# EAGLE board flossjtag-teardrops (EAGLE 7.4.0)
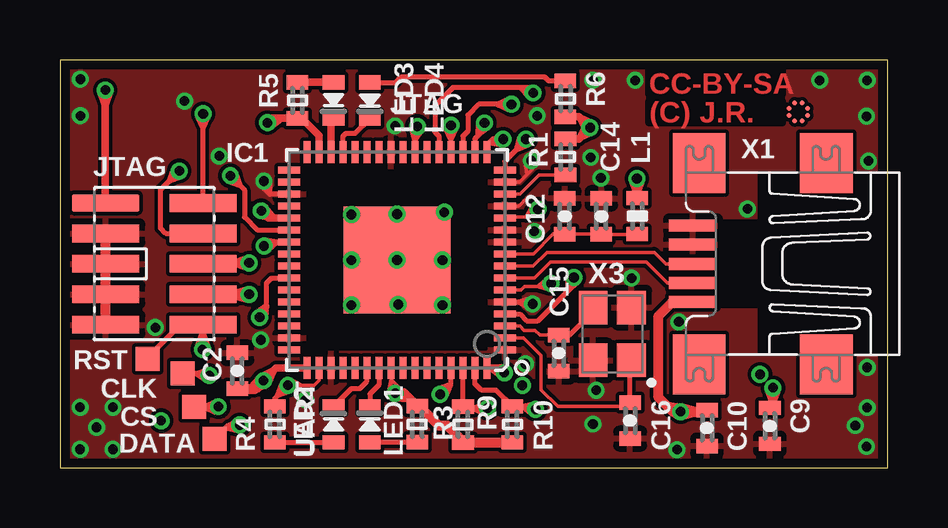
[diagram p0: board, top side]
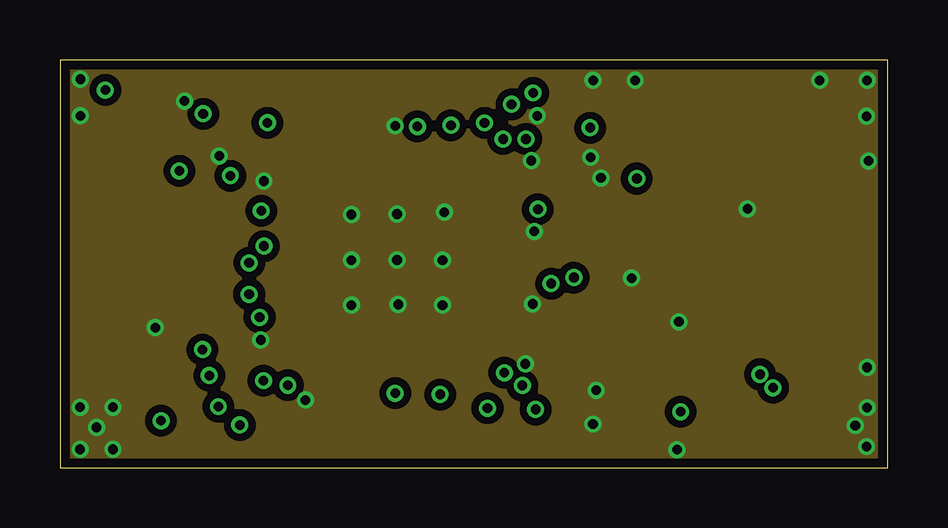
[diagram p1: board, inner layer Route2]
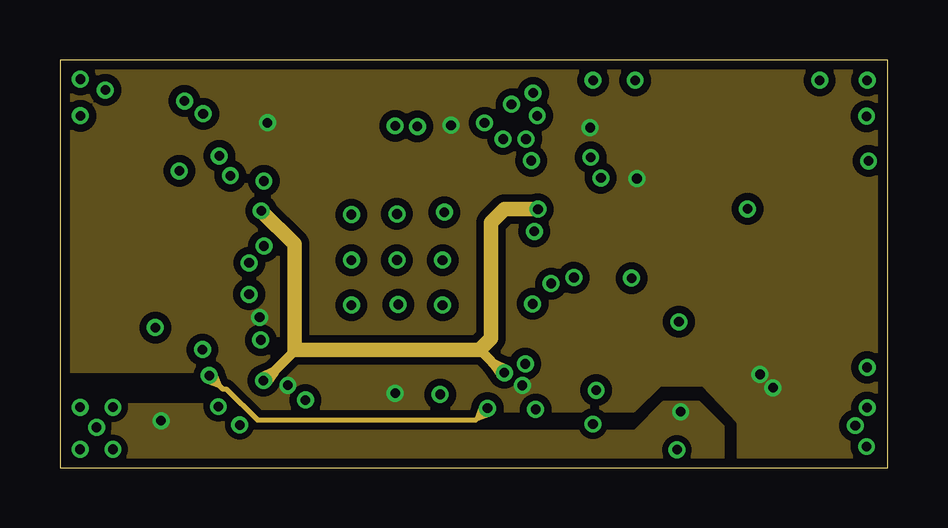
[diagram p2: board, inner layer Route15]
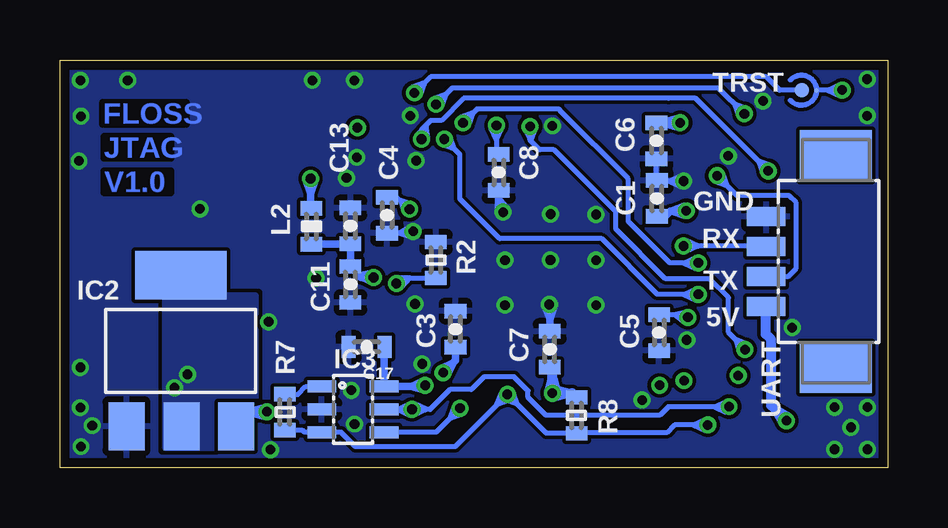
[diagram p3: board, bottom side, seen from below]

Size 34.5 x 17 mm. Coordinates in mm from the lower left corner, seen from the top.
Outline: 0,0 34.5,0 34.5,17 0,17 0,0
Copper layers (1*2+15*16): Top 0.035mm / dielectric 0.3mm / Route2 0.035mm / dielectric 0.15mm / Route15 0.035mm / dielectric 0.3mm / Bottom 0.035mm
Design rules "default *": minimum track width 6mil, minimum drill 13mil, track to track 6mil, track to pad 7mil, pad to pad 7mil, via to via 7mil, smd to smd 6mil, copper to edge 15mil, drill to drill 8mil, minimum pad ring 0.1mm, minimum via ring 6mil, stop-mask expansion 4mil, vias tented up to drill 0.4mm, thermal gap 10mil

## Footprints (pad centres in the part's own frame; a part is rotated, then mirrored left to right if it is on the bottom)
0603-CAP = smd 0.6 x 0.9: P$1 -0.75,0; P$2 0.75,0
CIRC_JMP = smd 0.61 x 0.61: 1 0,0 | smd 0.203 x 0.203: 2 0,0.617
SMD1,27 = smd 1 x 1: 1 0,0
QFN64 = smd 0.9 x 0.3: P$1 -4.5,3.75; P$2 -4.5,3.25; P$3 -4.5,2.75; P$4 -4.5,2.25; P$5 -4.5,1.75; P$6 -4.5,1.25; P$7 -4.5,0.75; P$8 -4.5,0.25; P$9 -4.5,-0.25; P$10 -4.5,-0.75; P$11 -4.5,-1.25; P$12 -4.5,-1.75; P$13 -4.5,-2.25; P$14 -4.5,-2.75; P$15 -4.5,-3.25; P$16 -4.5,-3.75; P$33 4.5,-3.75; P$34 4.5,-3.25; P$35 4.5,-2.75; P$36 4.5,-2.25; P$37 4.5,-1.75; P$38 4.5,-1.25; P$39 4.5,-0.75; P$40 4.5,-0.25; P$41 4.5,0.25; P$42 4.5,0.75; P$43 4.5,1.25; P$44 4.5,1.75; P$45 4.5,2.25; P$46 4.5,2.75; P$47 4.5,3.25; P$48 4.5,3.75 | smd 0.3 x 0.9: P$17 -3.75,-4.5; P$18 -3.25,-4.5; P$19 -2.75,-4.5; P$20 -2.25,-4.5; P$21 -1.75,-4.5; P$22 -1.25,-4.5; P$23 -0.75,-4.5; P$24 -0.25,-4.5; P$25 0.25,-4.5; P$26 0.75,-4.5; P$27 1.25,-4.5; P$28 1.75,-4.5; P$29 2.25,-4.5; P$30 2.75,-4.5; P$31 3.25,-4.5; P$32 3.75,-4.5; P$49 3.75,4.5; P$50 3.25,4.5; P$51 2.75,4.5; P$52 2.25,4.5; P$53 1.75,4.5; P$54 1.25,4.5; P$55 0.75,4.5; P$56 0.25,4.5; P$57 -0.25,4.5; P$58 -0.75,4.5; P$59 -1.25,4.5; P$60 -1.75,4.5; P$61 -2.25,4.5; P$62 -2.75,4.5; P$63 -3.25,4.5; P$64 -3.75,4.5 | smd 4.45 x 4.45: P$65 0,0
SOT223 = smd 1.499 x 2.007: 1 -2.261,-3.15; 2 0.025,-3.15; 3 2.311,-3.15 | smd 3.81 x 2.007: 4 0,3.15
SO23-6 = smd 0.5 x 1.2: 1 -0.95,-1.3; 2 0,-1.3; 3 0.95,-1.3; 4 0.95,1.3; 5 0,1.3; 6 -0.95,1.3
JOBY_LOGO_6MIL = smd 0.203 x 0.203: 1 -0.152,0.381; 2 0.152,0.381; 3 0.381,0.152; 4 0.381,-0.152; 5 0.152,-0.381; 6 -0.152,-0.381; 7 -0.381,-0.152; 8 -0.381,0.152
FTSH-105-DV = smd 0.74 x 2.8: 1 -2.54,-2.03; 2 -2.54,2.03; 3 -1.27,-2.03; 4 -1.27,2.03; 5 0,-2.03; 6 0,2.03; 7 1.27,-2.03; 8 1.27,2.03; 9 2.54,-2.03; 10 2.54,2.03
0603-IND = smd 0.6 x 0.9: P$1 -0.75,0; P$2 0.75,0
0603-LED = smd 0.6 x 0.9: A 0.75,0; C -0.75,0
0603-RES = smd 0.6 x 0.9: P$1 -0.75,0; P$2 0.75,0
PB-53261-04 = smd 0.8 x 1.6: 1 1.875,1.1; 2 0.625,1.1; 3 -0.625,1.1; 4 -1.875,1.1 | smd 2.1 x 3: MNT1 -4.425,-1.8; MNT2 4.425,-1.8
UX60A-MB-5ST = smd 2 x 0.5: 1 2.25,1.6; 2 2.25,0.8; 3 2.25,0; 4 2.25,-0.8; 5 2.25,-1.6 | smd 2.2 x 2.5: M1 -3.3,-4.2; M2 -3.3,4.2; M3 2,4.2; M4 2,-4.2
NX3225SA = smd 1.4 x 1.2: 1 -1.1,-0.8; 2 1.1,-0.8; 3 1.1,0.8; 4 -1.1,0.8

## Placement (x,y rotation side)
C1  100n  [0603-CAP]  9.61,11.22 90 bottom
C2  3u3  [0603-CAP]  7.4,4.04 90 top
C3  100n  [0603-CAP]  18.01,5.77 90 bottom
C4  100n  [0603-CAP]  20.86,10.53 270 bottom
C5  100n  [0603-CAP]  9.53,5.63 270 bottom
C6  100n  [0603-CAP]  9.63,13.63 270 bottom
C7  100n  [0603-CAP]  14.08,4.93 90 bottom
C8  100n  [0603-CAP]  16.21,12.31 270 bottom
C9  CAPACITOR  [0603-CAP]  29.59,1.74 270 top
C10  100n  [0603-CAP]  26.98,1.65 270 top
C11  100n  [0603-CAP]  22.39,7.64 270 bottom
C12  100n  [0603-CAP]  21.04,10.48 90 top
C13  4u7  [0603-CAP]  22.39,10.08 90 bottom
C14  4u7  [0603-CAP]  22.57,10.48 90 top
C15  27p  [0603-CAP]  20.79,4.76 270 top
C16  27p  [0603-CAP]  23.77,1.96 270 top
C17  100n  [0603-CAP]  21.72,5.03 180 bottom
CJ1  CIRC_JMP  [CIRC_JMP]  3.58,15.74 270 bottom
CLK  WIREPAD  [SMD1,27]  5.11,3.94 0 top
CS  WIREPAD  [SMD1,27]  5.59,2.54 0 top
DATA  WIREPAD  [SMD1,27]  6.45,1.19 0 top
DRILEGEND  [DRILEGEND]  -2.76,-5.53 0 top  (outside the outline)
IC1  FT2232HLQFN64  [QFN64]  14.05,8.65 180 top
IC2  REG1117  [SOT223]  29.46,4.87 0 bottom
IC3  93C46-SO23-6  [SO23-6]  22.28,2.43 270 bottom
JL1  JOBY_LOGO-6MIL  [JOBY_LOGO_6MIL]  30.78,14.83 0 top
JTAG  CONN_5-2-FTSH-V  [FTSH-105-DV]  3.94,8.5 270 top
L1  [0603-IND]  24.07,10.49 270 top
L2  [0603-IND]  24.02,10.06 270 bottom
LED1  [0603-LED]  12.92,1.8 270 top
LED2  [0603-LED]  11.4,1.8 270 top
LED3  LED  [0603-LED]  11.4,15.32 90 top
LED4  LED  [0603-LED]  12.92,15.31 90 top
R1  1k  [0603-RES]  21.07,12.95 270 top
R2  12k  [0603-RES]  18.83,8.66 270 bottom
R3  220  [0603-RES]  14.89,1.8 90 top
R4  220  [0603-RES]  8.96,1.8 90 top
R5  220  [0603-RES]  9.9,15.31 270 top
R6  220  [0603-RES]  21.07,15.38 270 top
R7  2k2  [0603-RES]  25.12,2.32 90 bottom
R8  10k  [0603-RES]  12.96,2.18 270 bottom
R9  10k  [0603-RES]  16.8,1.79 90 top
R10  10k  [0603-RES]  18.86,1.8 90 top
RST  RST  [SMD1,27]  3.66,4.52 0 top
UART  [PB-53261-04]  3.96,8.6 90 bottom
X1  MINI-USB-UX60A-MB-5ST  [UX60A-MB-5ST]  28.64,8.5 180 top
X3  12MHz  [NX3225SA]  23.03,5.57 90 top

## Library data of the parts
C1-C8 C11-C14 L1 L2 R1-R10 = res_cap
C9 C10 C15-C17 LED1-LED4 UART = open-bldc
CJ1 = fancy_jumpers
CLK CS DATA RST = wirepad
DRILEGEND = drilegend
IC1 = ftdi-jtag
IC2 = burr-brown
IC3 X3 = misc
JL1 = aspirin
JTAG = pel_misc
X1 = con-hirose

## Nets
+3V3: C5.P$1 C6.P$1 C7.P$1 C8.P$1 C9.P$1 C17.P$1 IC1.P$20 IC1.P$31 IC1.P$42 IC1.P$50 IC1.P$56 IC2.2 IC2.4 IC3.6 L1.P$1 L2.P$1 R1.P$1 R3.P$2 R4.P$2 R5.P$2 R6.P$2 R8.P$1 R9.P$1 R10.P$1
+5V: C10.P$1 IC2.3 UART.4 X1.1
EECLK: CLK.1 IC1.P$62 IC3.4 R9.P$2
EECS: CS.1 IC1.P$63 IC3.5 R10.P$2
EEDATA: DATA.1 IC1.P$61 IC3.3 R7.P$1 R8.P$2
GND: C1.P$2 C2.P$2 C3.P$2 C4.P$2 C5.P$2 C6.P$2 C7.P$2 C8.P$2 C9.P$2 C10.P$2 C11.P$2 C12.P$2 C13.P$2 C14.P$2 C15.P$2 C16.P$2 C17.P$2 IC1.P$1 IC1.P$5 IC1.P$10 IC1.P$11 IC1.P$13 IC1.P$15 IC1.P$25 IC1.P$35 IC1.P$47 IC1.P$51 IC1.P$65 IC2.1 IC3.2 JTAG.3 JTAG.5 JTAG.7 JTAG.9 R2.P$1 UART.1 X1.4 X1.5 X3.2 X3.4
JRXD_LED: IC1.P$29 LED4.C
JTXD_LED: IC1.P$30 LED3.C
N$1: IC1.P$14 R1.P$2
N$2: IC1.P$6 R2.P$2
N$3: IC1.P$7 X1.2
N$4: IC1.P$8 X1.3
N$6: C16.P$1 IC1.P$2 X3.1
N$7: C12.P$1 C14.P$1 IC1.P$9 L1.P$2
N$8: C11.P$1 C13.P$1 IC1.P$4 L2.P$2
N$9: C15.P$1 IC1.P$3 X3.3
N$10: LED1.A R3.P$1
N$11: LED2.A R4.P$1
N$12: LED3.A R5.P$1
N$13: LED4.A R6.P$1
N$17: IC3.1 R7.P$2
N$19: CJ1.2 JTAG.1
RST: IC1.P$23 JTAG.10 RST.1
RXD: IC1.P$39 UART.2
RXD_LED: IC1.P$54 LED2.C
TCK: IC1.P$16 JTAG.4
TDI: IC1.P$17 JTAG.8
TDO: IC1.P$18 JTAG.6
TMS: IC1.P$19 JTAG.2
TRST: CJ1.1 IC1.P$21
TXD: IC1.P$38 UART.3
TXD_LED: IC1.P$55 LED1.C
VCC: C1.P$1 C2.P$1 C3.P$1 C4.P$1 IC1.P$12 IC1.P$37 IC1.P$49 IC1.P$64

## Tracks (layer width: path | path; a pad name or v marks a point on that pad's centre or on a via)
+3V3  (via drill 0.4 pad 0.64)
  Top 0.152: R4.P$2 8.9,2.55 | R3.P$2 14.75,2.55 | R3.P$2 15.05,2.55 | R9.P$1 16.86,1.04 | 15,2.55 R3.P$2 | R5.P$2 9.88,14.55 | v9.5,3.43 10.59,3.43 10.79,3.63 IC1.P$50 | IC1.P$56 13.8,3.27 v13.97,3.1 | v9.5,3.43 9.63,3.68 10.1,3.43 9.63,3.19 v9.5,3.43 | v13.97,3.1 13.7,3.15 13.8,3.68 14.17,3.29 v13.97,3.1
  Top 0.203: IC1.P$42 8.82,7.91 8.61,7.7 8.61,6.55 v8.32,6.26 | IC1.P$20 v16.3,14.28 | R4.P$2 8.96,2.9 v9.5,3.43 | v9.5,3.43 9.59,3.2 9.07,3.01 9.26,3.52 v9.5,3.43 | v8.32,6.26 8.17,6.46 8.61,6.79 8.57,6.25 v8.32,6.26 | v16.3,14.28 16.53,14.17 16.3,13.68 16.07,14.17 v16.3,14.28
  Top 0.305: IC1.P$31 10.8,13.85 10.1,14.55 9.88,14.55 9.63,14.55 | v22.1,14.18 21.64,14.63 R6.P$2 | v22.1,14.18 21.63,13.7 R1.P$1 | L1.P$1 24.05,11.26 v24.05,12.05 | v8.65,14.38 8.83,14.56 R5.P$2 | C9.P$1 29.73,2.62 v29.73,3.33 | v8.65,14.38 8.65,14.58 9.22,14.56 8.77,14.22 v8.65,14.38 | v22.1,14.18 21.92,14.09 21.68,14.6 22.19,14.36 v22.1,14.18 | v22.1,14.18 22.19,13.99 21.68,13.75 21.92,14.26 v22.1,14.18 | v24.05,12.05 24.24,11.99 24.05,11.45 23.86,11.99 v24.05,12.05 | v29.73,3.33 29.91,3.26 29.73,2.73 29.54,3.26 v29.73,3.33
  Top 0.406: 15,2.55 15.8,1.75 16.15,1.75 16.8,1.1 R9.P$1 | v13.97,3.1 14.34,3.1 R3.P$2 | 16.86,1.04 16.86,1.05 R10.P$1 | v13.97,3.1 14.06,3.23 14.54,2.9 13.96,2.95 v13.97,3.1
  Bottom 0.203: C5.P$1 8.44,6.38 v8.32,6.26 | C8.P$1 IC1.P$20 16.3,13.72 v16.3,14.28 | v8.32,6.26 8.38,6.51 8.91,6.38 8.47,6.06 v8.32,6.26 | v16.3,14.28 16.53,14.17 16.3,13.68 16.07,14.17 v16.3,14.28
  Bottom 0.305: v19.27,3.42 19.32,3.38 IC3.6 20.98,5.01 C17.P$1 | L2.P$1 24.05,10.84 v24.05,12.05 | v24.05,12.05 24.24,11.99 24.05,11.45 23.86,11.99 v24.05,12.05 | v19.27,3.42 19.36,3.61 19.87,3.38 19.33,3.23 v19.27,3.42
  Bottom 0.406: C6.P$1 v8.65,14.38 | C7.P$1 13.97,4.08 v13.97,3.1 | R8.P$1 13.14,3.1 v13.97,3.1 | v13.97,3.1 13.83,3.14 13.97,3.7 14.12,3.14 v13.97,3.1 | v13.97,3.1 13.94,2.96 13.37,3.1 13.94,3.25 v13.97,3.1 | v8.65,14.38 8.69,14.53 9.25,14.38 8.68,14.24 v8.65,14.38
  Bottom 0.813: IC2.4 29.21,7.77
  other vias: 29.18,3.89
  pour Route15 (isolate 0.305): 0,4.05 6.67,4.04 8.1,2.4 23.9,2.4 25,3.5 26.8,3.5 28.3,1.9 28.3,0 34.5,0 34.5,17 0,17
  pour Bottom (no thermals): 26.37,0.84 26.37,7.16 30.1,7.16 30.1,0.84
+5V  (via drill 0.4 pad 0.64)
  Top 0.406: X1.1 25.52,6.9 24.95,6.33 24.95,2.93 25.55,2.33 v25.88,2.33 | C10.P$1 26.9,2.33 v25.88,2.33 | v25.88,2.33 25.79,2.21 25.32,2.56 25.9,2.47 v25.88,2.33 | v25.88,2.33 25.91,2.47 26.48,2.33 25.91,2.18 v25.88,2.33
  Bottom 0.203: IC2.3 27.15,1.88 26.7,2.33
  Bottom 0.406: 26.7,2.33 v25.88,2.33 | UART.4 5.08,6.72 5.08,5.56 4.85,5.33 4.85,2.59 v4.22,1.96 | v25.88,2.33 25.91,2.47 26.48,2.33 25.91,2.18 v25.88,2.33 | v4.22,1.96 4.14,2.08 4.64,2.38 4.34,1.88 v4.22,1.96
  pour Route15 (isolate 0.254): 0,0 0,2.6 6.6,2.6 7.5,1.5 24,1.5 25.2,2.7 26.6,2.7 27.6,1.7 27.6,0
EECLK  (via drill 0.4 pad 0.64)
  Top 0.203: CLK.1 6.12,3.94 v6.22,3.83 | IC1.P$62 | IC1.P$62 R9.P$2 16.87,2.47 v17.82,2.47 | v17.82,2.47 17.72,2.25 17.22,2.47 17.72,2.7 v17.82,2.47 | v6.22,3.83 6.08,3.63 5.63,3.94 6.16,4.08 v6.22,3.83
  Route15 0.203: v6.22,3.83 6.78,3.28 6.93,3.28 8.23,1.98 17.3,1.98 17.33,1.98 v17.82,2.47 | v17.82,2.47 17.91,2.24 17.4,2.05 17.59,2.56 v17.82,2.47 | v6.22,3.83 6.46,3.92 6.65,3.41 6.14,3.6 v6.22,3.83
  Bottom 0.203: v17.82,2.47 18.82,1.48 IC3.4 | v17.82,2.47 18.06,2.56 18.25,2.05 17.74,2.24 v17.82,2.47
EECS  (via drill 0.4 pad 0.64)
  Top 0.203: IC1.P$63 17.3,3.5 17.58,3.22 18.19,3.22 R10.P$2 19.7,2.55 v19.82,2.42 | CS.1 v6.6,2.54 | v19.82,2.42 19.67,2.22 19.24,2.55 19.77,2.67 v19.82,2.42 | v6.6,2.54 6.5,2.31 6,2.54 6.5,2.77 v6.6,2.54
  Bottom 0.203: v6.6,2.54 9.14,2.54 9.5,2.18 14.25,2.18 14.99,2.92 14.99,3.2 15.57,3.79 16.82,3.79 17.35,3.25 18.24,3.25 19.06,2.42 v19.82,2.42 | v19.82,2.42 IC3.5 | v19.82,2.42 19.72,2.2 19.23,2.42 19.72,2.65 v19.82,2.42 | v19.82,2.42 19.93,2.65 20.43,2.42 19.93,2.2 v19.82,2.42 | v6.6,2.54 6.71,2.77 7.2,2.54 6.71,2.31 v6.6,2.54
EEDATA  (via drill 0.4 pad 0.64)
  Top 0.203: IC1.P$61 16.3,3.5 v15.85,3.05 | DATA.1 7.04,1.78 v7.49,1.78 | v15.85,3.05 15.76,3.29 16.27,3.47 16.08,2.96 v15.85,3.05 | v7.49,1.78 7.44,1.53 6.91,1.65 7.34,1.98 v7.49,1.78
  Bottom 0.152: 25.11,1.55 R7.P$1
  Bottom 0.203: v15.85,3.05 14.25,1.45 14.23,1.43 R8.P$2 12.94,1.45 9.21,1.45 8.88,1.78 v7.49,1.78 | 25.11,1.55 24.38,1.55 24.3,1.48 IC3.3 22.78,1.48 22.18,0.88 18.02,0.88 v15.85,3.05 | v15.85,3.05 15.93,2.81 15.42,2.63 15.61,3.14 v15.85,3.05 | v15.85,3.05 16.08,3.14 16.27,2.63 15.76,2.81 v15.85,3.05 | v7.49,1.78 7.6,2.01 8.09,1.78 7.6,1.55 v7.49,1.78
GND  (via drill 0.4 pad 0.64)
  Top 0.152: IC1.P$47 | IC1.P$15 19.16,11.9 19.65,12.4 v19.65,12.8 | IC1.P$13 19.14,10.9 19.43,11.2 | v19.65,12.8 19.85,12.61 19.48,12.22 19.38,12.75 v19.65,12.8
  Top 0.203: IC1.P$35 8.74,11.4 8.5,11.65 v8.5,11.95 | IC1.P$5 19.62,6.91 v19.7,6.83 | v8.5,11.95 8.75,11.95 8.75,11.4 8.34,11.76 v8.5,11.95 | v19.7,6.83 19.57,6.61 19.11,6.91 19.63,7.07 v19.7,6.83
  Top 0.305: IC1.P$1 18.74,4.91
  Top 0.406: JTAG.3 JTAG.5 JTAG.7 JTAG.9
  Bottom 0.152: 14.08,6.78 v14.1,6.8 | R2.P$1 19.05,9.41
  Bottom 0.203: v8.5,11.95 9.59,11.95 C1.P$2 9.63,11.99 C6.P$2 | C4.P$2 19.7,9.78 v19.77,9.85 | IC2.1 31.75,1.75 | v8.5,11.95 8.61,12.18 9.1,11.95 8.61,11.72 v8.5,11.95 | v19.77,9.85 19.91,10.06 20.37,9.78 19.85,9.61 v19.77,9.85
  Bottom 0.305: C7.P$2 14.08,6.78 | C8.P$2 16.21,10.84 v16.02,10.65 | v16.02,10.65 15.87,10.77 16.21,11.22 16.23,10.65 v16.02,10.65 | 14.08,6.2 14.29,6.73 v14.1,6.8 13.91,6.74 14.08,6.2
  other vias: 33.62,0.88 33.65,2.5 22.12,12.94 33.65,16.15 31.68,16.15 33.62,14.65 8.37,5.32 10.23,2.82 13.97,14.25 22.55,12.08 33.16,1.75 23.82,7.9 12.15,6.78 15.95,6.78 15.95,8.65 14.05,10.57 14.05,8.65 12.15,8.65 12.15,10.55 19.4,4.32 22.35,3.22 0.84,0.76 2.21,2.51 22.23,16.15 23.98,16.15 33.71,12.79 33.65,4.18 25.8,6.08 25.73,0.75 22.22,1.81 2.21,0.76 0.84,2.51 0.85,14.67 0.85,16.2 28.66,10.79 19.9,14.67 3.97,5.84 6.64,13 5.19,15.28 1.52,1.68
  pour Route2 (isolate 0.305): 0,0 34.5,0 34.5,17 0,17
  pour Top: 0,0 34.5,0 34.5,17 -0.05,17.03
  pour Bottom (rank 6): 0,0 34.5,0 34.5,17 -0.05,17.03
JRXD_LED
  Top 0.203: IC1.P$29 11.8,13.82 11.92,13.94 12.31,13.94 LED4.C
JTXD_LED
  Top 0.305: LED3.C 11.3,14.46 IC1.P$30
N$1
  Top 0.152: IC1.P$14 19.18,11.4 19.98,12.2 R1.P$2
N$2  (via drill 0.4 pad 0.64)
  Top 0.152: v20.47,7.67 20.34,7.54 19.36,7.54 19.22,7.41 IC1.P$6 | v20.47,7.67 20.4,7.41 19.89,7.54 20.3,7.89 v20.47,7.67
  Bottom 0.203: R2.P$2 20.24,7.91 v20.47,7.67 | v20.47,7.67 20.29,7.51 19.92,7.91 20.46,7.93 v20.47,7.67
N$3
  Top 0.152: X1.2 25.32,7.7 24.45,8.57 20.45,8.57 19.79,7.91 IC1.P$7
N$4
  Top 0.152: X1.3 25.25,8.5 24.77,8.97 20.29,8.97 19.72,8.41 IC1.P$8
N$6
  Top 0.152: IC1.P$2 19.32,5.41 20.05,4.67 20.05,3.25 20.75,2.55 23.61,2.55 C16.P$1 | 23.77,4.41 X3.1
  Top 0.203: C16.P$1 23.77,4.41
N$7
  Top 0.152: IC1.P$9 18.56,8.91 19.74,8.91 20.55,9.73 C12.P$1 C14.P$1 24.06,9.73 L1.P$2
N$8  (via drill 0.4 pad 0.64)
  Top 0.203: IC1.P$4 19.17,6.41 19.45,6.12 19.92,6.12 21.43,7.62 v21.43,7.92 | v21.43,7.92 21.59,7.74 21.18,7.38 21.17,7.92 v21.43,7.92
  Bottom 0.305: C13.P$1 C11.P$1 22.39,8.37 21.95,7.92 v21.43,7.92 | C13.P$1 | C13.P$1 24,9.33 L2.P$2 | v21.43,7.92 21.47,8.12 22.02,8 21.51,7.75 v21.43,7.92
N$9
  Top 0.152: IC1.P$3 19.17,5.91 19.35,5.72 19.8,5.72 20,5.53 20.78,5.53 C15.P$1 | 22.23,6.5 X3.3
  Top 0.203: C15.P$1 21.24,5.51 22.23,6.5
N$10
  Top 0.152: R3.P$1
  Top 0.203: R3.P$1 LED1.A
N$11
  Top 0.203: R4.P$1 LED2.A
N$12
  Top 0.305: R5.P$1 LED3.A
N$13
  Top 0.203: LED4.A 13.98,16.06 14.22,16.3 20.2,16.3 20.37,16.13 R6.P$1
N$17
  Bottom 0.152: R7.P$2 25.11,3.05
  Bottom 0.203: IC3.1 24.25,3.38 24.58,3.05 25.11,3.05
N$19  (via drill 0.4 pad 0.64)
  Top 0.305: JTAG.1 1.89,11.05 v1.89,15.74 | v1.89,15.74 2.08,15.68 1.89,15.14 1.7,15.68 v1.89,15.74
  Bottom 0.203: v1.89,15.74 CJ1.2 | v1.89,15.74 1.99,15.97 2.49,15.74 1.99,15.52 v1.89,15.74
RST  (via drill 0.4 pad 0.64)
  Top 0.152: IC1.P$23
  Top 0.203: RST.1 3.66,4.6 5,5.94 5.96,5.94 JTAG.10 | IC1.P$23 14.8,14.13 v14.9,14.23 | v14.9,14.23 15.11,14.09 14.8,13.63 14.66,14.16 v14.9,14.23
  Top 0.305: JTAG.10 5.95,5.93 v5.95,4.92 | v5.95,4.92 5.76,4.99 5.95,5.52 6.13,4.99 v5.95,4.92
  Bottom 0.203: v5.95,4.92 5.95,4.96 6.63,5.64 6.63,7.09 7.42,7.87 9.25,7.87 11.33,9.95 11.33,10.68 13.91,13.26 13.92,13.26 14.5,13.26 14.9,13.65 v14.9,14.23 | v5.95,4.92 5.85,5.15 6.35,5.36 6.18,4.84 v5.95,4.92 | v14.9,14.23 15.12,14.11 14.87,13.63 14.67,14.13 v14.9,14.23
RXD  (via drill 0.4 pad 0.64)
  Top 0.152: IC1.P$39
  Top 0.203: IC1.P$39 8.67,9.41 v8.5,9.24 | v8.5,9.24 8.54,9.49 9.08,9.41 8.67,9.05 v8.5,9.24
  Bottom 0.203: UART.2 5.08,9.24 v8.5,9.24 | v8.5,9.24 8.4,9.01 7.9,9.24 8.4,9.47 v8.5,9.24
RXD_LED
  Top 0.203: IC1.P$54 12.8,3.6 12.5,3.3 12.28,3.3 12.15,3.3 LED2.C
TCK  (via drill 0.4 pad 0.64)
  Top 0.203: v4.97,12.37 4.19,11.59 4.19,9.98 4.41,9.77 JTAG.4 | IC1.P$16 18.55,12.78 19.43,13.65 v19.43,13.7 | v4.97,12.37 5.06,12.13 4.55,11.95 4.74,12.46 v4.97,12.37 | v19.43,13.7 19.53,13.47 19.03,13.25 19.19,13.77 v19.43,13.7
  Bottom 0.203: v4.97,12.37 8,15.4 9.12,15.4 17.68,15.4 18.6,14.48 19.05,14.48 19.43,14.1 v19.43,13.7 | v4.97,12.37 4.88,12.61 5.4,12.79 5.21,12.28 v4.97,12.37 | v19.43,13.7 19.18,13.73 19.25,14.28 19.61,13.87 v19.43,13.7
TDI  (via drill 0.4 pad 0.64)
  Top 0.203: IC1.P$17 17.8,13.45 18.05,13.7 v18.48,13.7 | v18.48,13.7 18.43,13.45 17.9,13.55 18.32,13.89 v18.48,13.7
  Top 0.406: JTAG.8 v7.88,7.23 v7.88,7.22 | v7.88,7.22 7.85,7.08 7.29,7.23 7.85,7.37 v7.88,7.22
  Bottom 0.203: v7.88,7.22 9.6,7.22 11.92,9.54 16.17,9.54 17.83,11.2 17.83,13.05 v18.48,13.7 | v7.88,7.22 7.99,7.45 8.48,7.22 7.99,7 v7.88,7.22 | v18.48,13.7 18.56,13.46 18.05,13.28 18.24,13.79 v18.48,13.7
TDO  (via drill 0.4 pad 0.64)
  Top 0.203: v17.7,14.37 17.7,14.12 17.3,13.72 IC1.P$18 | v17.7,14.37 17.85,14.18 17.42,13.84 17.45,14.39 v17.7,14.37
  Top 0.305: JTAG.6 6.01,8.54 v7.89,8.54 | v7.89,8.54 7.82,8.35 7.29,8.54 7.82,8.72 v7.89,8.54
  Bottom 0.203: v17.7,14.37 17.12,14.95 13.7,14.95 13.62,14.88 13.62,14.87 10.81,12.05 10.81,10.26 9.08,8.54 v7.89,8.54 | v7.89,8.54 7.99,8.76 8.49,8.54 7.99,8.31 v7.89,8.54 | v17.7,14.37 17.46,14.29 17.27,14.8 17.79,14.61 v17.7,14.37
TMS  (via drill 0.4 pad 0.64)
  Top 0.203: IC1.P$19 16.8,13.83 17,14.03 17,14.7 17.45,15.15 v18.82,15.15 | v5.97,14.75 JTAG.2 | v5.97,14.75 6.2,14.65 5.97,14.15 5.74,14.65 v5.97,14.75 | v18.82,15.15 18.72,14.92 18.23,15.15 18.72,15.38 v18.82,15.15
  Bottom 0.203: v18.82,15.15 18.15,15.82 8.3,15.82 7.04,15.82 v5.97,14.75 | v5.97,14.75 5.88,14.99 6.39,15.18 6.21,14.67 v5.97,14.75 | v18.82,15.15 18.59,15.06 18.4,15.57 18.91,15.38 v18.82,15.15
TRST  (via drill 0.4 pad 0.64)
  Top 0.203: IC1.P$21 15.8,13.82 15.62,14 15.62,15.1 16.38,15.85 19.5,15.85 v19.73,15.62 | v19.73,15.62 19.54,15.45 19.17,15.85 19.71,15.88 v19.73,15.62
  Bottom 0.203: CJ1.1 4.49,15.74 5.06,16.3 19.05,16.3 v19.73,15.62 | v19.73,15.62 19.49,15.54 19.3,16.05 19.81,15.86 v19.73,15.62
TXD  (via drill 0.4 pad 0.64)
  Top 0.152: IC1.P$38
  Top 0.203: IC1.P$38 8.23,9.91 7.7,10.44 7.7,11.58 v7.1,12.17 | v7.1,12.17 7.34,12.26 7.53,11.75 7.02,11.94 v7.1,12.17
  Bottom 0.203: v7.1,12.17 6.29,11.35 4.12,11.35 3.81,11.05 3.81,8.31 4.14,7.97 UART.3 | v7.1,12.17 7.19,11.94 6.68,11.75 6.87,12.26 v7.1,12.17
TXD_LED
  Top 0.203: IC1.P$55 13.3,3.45 12.92,3.07 LED1.C
VCC  (via drill 0.4 pad 0.64)
  Top 0.152: IC1.P$49 10.27,4.13 | v19.93,10.78 19.59,10.44 19.13,10.44 18.59,10.44 IC1.P$12 | v19.93,10.78 19.96,10.5 19.43,10.44 19.68,10.91 v19.93,10.78
  Top 0.305: IC1.P$37 8.69,10.4 v8.39,10.71 | IC1.P$64 18.32,4.16 v18.53,3.95 | IC1.P$49 9.02,4.16 v8.49,3.62 | v8.39,10.71 8.54,10.84 8.91,10.4 8.35,10.51 v8.39,10.71 | v18.53,3.95 18.4,3.8 17.96,4.16 18.53,4.15 v18.53,3.95 | v8.49,3.62 8.4,3.81 8.91,4.05 8.67,3.54 v8.49,3.62
  Top 0.406: C2.P$1 8.15,3.29 v8.49,3.62 | v8.49,3.62 8.54,3.48 7.99,3.29 8.38,3.72 v8.49,3.62
  Route15 0.406: v8.49,3.62 8.56,3.62 9.83,4.9 | v18.53,3.95 18.45,3.95 17.51,4.9 | v18.53,3.95 18.41,3.86 18.07,4.33 18.59,4.08 v18.53,3.95 | v8.49,3.62 8.42,3.76 8.95,4.01 8.61,3.54 v8.49,3.62
  Route15 0.61: v8.39,10.71 9.78,9.32 9.78,4.9 9.83,4.9 17.48,4.9 | v19.93,10.78 18.53,10.78 17.98,10.22 17.98,5.52 17.98,5.39 17.48,4.9 | 17.48,4.9 17.51,4.9
  Bottom 0.152: C1.P$1 | C4.P$1 20.43,11.28 v19.93,10.78 | v19.93,10.78 19.84,11.04 20.35,11.2 20.19,10.69 v19.93,10.78
  Bottom 0.305: v8.39,10.71 9.05,10.71 9.28,10.48 C1.P$1 | C3.P$1 18.01,4.47 v18.53,3.95 | v8.39,10.71 8.46,10.9 8.99,10.71 8.46,10.52 v8.39,10.71 | v18.53,3.95 18.35,3.87 18.1,4.38 18.61,4.13 v18.53,3.95

## Text on the board
Top: CC-BY-SA | (C) J.R.
Bottom: FLOSS | JTAG | V1.0
tPlace: JTAG | UART
bPlace: TRST | GND | RX | TX | 5V
tNames: X3
tStop: CC-BY-SA | (C) J.R.
bStop: FLOSS | JTAG | V1.0
_tNames: IC1 | R6 | R5 | LED3 | LED4 | R1 | L1 | X1 | C14 | X2 | C12 | C15 | S1 | C2 | LED2 | LED1 | C16 | C10 | C9 | R9 | R4 | R3 | R10
_bNames: C6 | X4 | C8 | C4 | C13 | C1 | L2 | R2 | C11 | C5 | IC2 | C3 | IC3 | C7 | R8 | R7